# Altium PCB PCB1.PcbDoc
Units mil, origin at the board's own origin, x right, y up, seen from the top; angles counter-clockwise.
Board outline 6624.2 x 3240.03 mil, 2 copper layers (Top Layer, Bottom Layer); 35 components, 65 nets, 242 pads, 0 vias.
Unrouted connection lines stored in the file: 2.
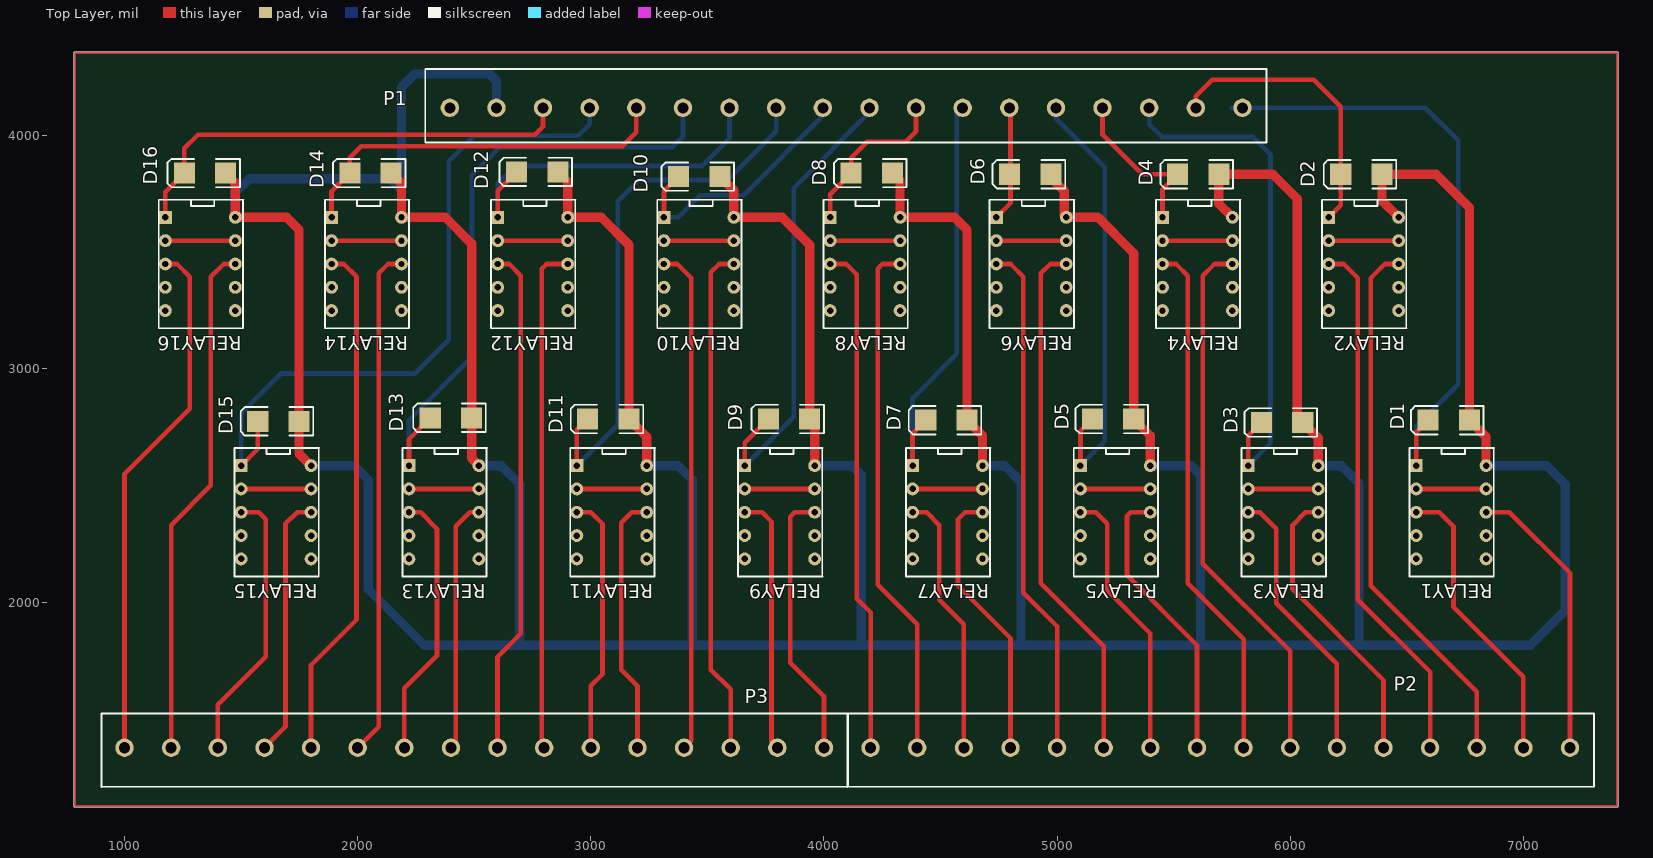
[diagram p0: Top Layer view]
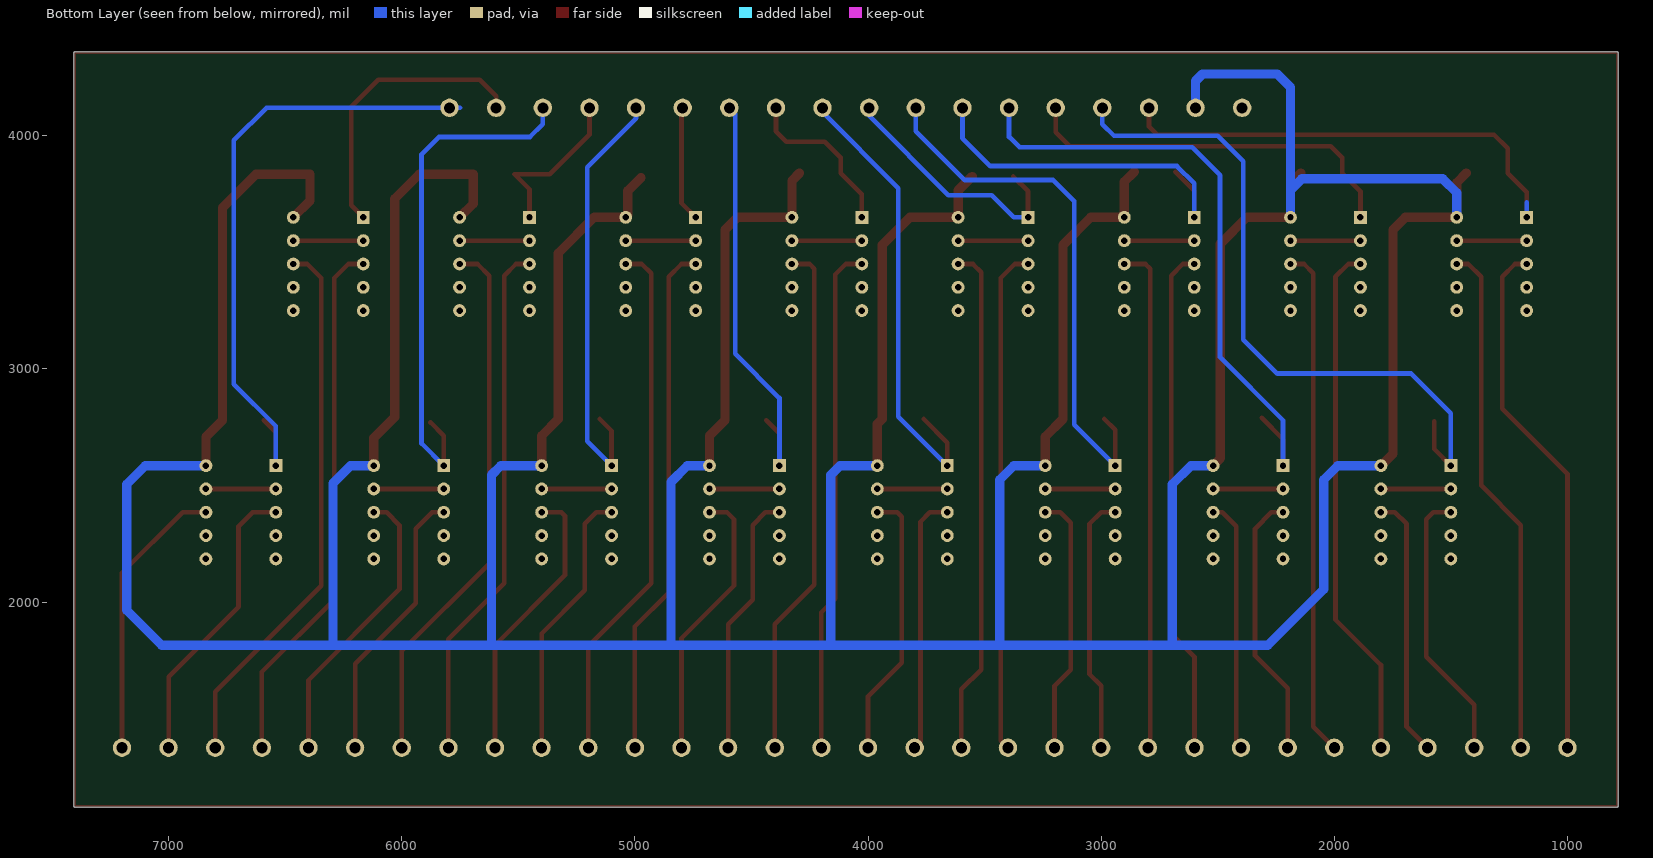
[diagram p1: Bottom Layer view, seen from below]

## Layer stack, top to bottom
Top Solder: solder mask 0.4, Solder Resist, Dk 3.5
Top Layer: signal copper 1.4
Dielectric 1: dielectric 12.6, FR-4, Dk 4.8
Bottom Layer: signal copper 1.4
Bottom Solder: solder mask 0.4, Solder Resist, Dk 3.5

## Board outline
782.39,1125 782.39,4353.35 cw(c787.4,4353.35) 782.46,4354.17 cw(c787.4,4355) 787.4,4360.02 7401.57,4360.02 cw(c7401.57,4355) 7406.59,4355 cw(c7401.57,4355) 7406.52,4354.17 cw(c7401.57,4353.35) 7406.59,4353.35 7406.59,1125 cw(c7401.57,1125) 7401.57,1119.98 787.4,1119.98 cw(c787.4,1125)

## Design rules (kind name [scope] priority, off if disabled: settings)
Clearance [All] p1: gap=20
PolygonConnect [All] p1: connectstyle=Relief reliefconductorwidth=10 reliefentries=4 polygonreliefangle="90 Angle" airgapwidth=10
RoutingVias [All] p1: holewidth=28 width=50 viastyle="Through Hole" minholewidth=28 minwidth=50 maxholewidth=28 maxwidth=50
SolderMaskExpansion [All] p1: expansion=4
Width [All] p1: maxlimit=100 minlimit=10 preferedwidth=20
30 further rules are at their usual default settings.

## Components (designator, comment, footprint, x,y, rotation, side; value= is the part's Value field where it differs from the comment)
D1 "Diode" SMB 6680,2780 r180 top
D2 "Diode" SMB 6305,3835 r180 top
D3 "Diode" SMB 5965,2770 r180 top
D4 "Diode" SMB 5605,3835 r180 top
D5 "Diode" SMB 5240,2785 r180 top
D6 "Diode" SMB 4885,3835 r180 top
D7 "Diode" SMB 4525,2780 r180 top
D8 "Diode" SMB 4205,3840 r180 top
D9 "Diode" SMB 3850,2785 r180 top
D10 "Diode" SMB 3465,3825 r180 top
D11 "Diode" SMB 3075,2785 r180 top
D12 "Diode" SMB 2770,3845 r180 top
D13 "Diode" SMB 2400,2790 r180 top
D14 "Diode" SMB 2055,3840 r180 top
D15 "Diode" SMB 1660,2775 r180 top
D16 "Diode" SMB 1345,3840 r180 top
P1 "Header 18" "CON 18" 2395,4120 r0 top
P2 "Header 16" "CON 16" 7200,1375 r180 top
P3 "Header 16" "CON 16" 4000,1375 r180 top
RELAY1 "OMRON RELAY" G6H-2 6540,2585 r270 top
RELAY2 "OMRON RELAY" G6H-2 6165,3650 r270 top
RELAY3 "OMRON RELAY" G6H-2 5820,2585 r270 top
RELAY4 "OMRON RELAY" G6H-2 5452.14,3650 r270 top
RELAY5 "OMRON RELAY" G6H-2 5100,2585 r270 top
RELAY6 "OMRON RELAY" G6H-2 4739.29,3650 r270 top
RELAY7 "OMRON RELAY" G6H-2 4380,2585 r270 top
RELAY8 "OMRON RELAY" G6H-2 4026.43,3650 r270 top
RELAY9 "OMRON RELAY" G6H-2 3660,2585 r270 top
RELAY10 "OMRON RELAY" G6H-2 3313.57,3650 r270 top
RELAY11 "OMRON RELAY" G6H-2 2940,2585 r270 top
RELAY12 "OMRON RELAY" G6H-2 2600.71,3650 r270 top
RELAY13 "OMRON RELAY" G6H-2 2220,2585 r270 top
RELAY14 "OMRON RELAY" G6H-2 1887.86,3650 r270 top
RELAY15 "OMRON RELAY" G6H-2 1500,2585 r270 top
RELAY16 "OMRON RELAY" G6H-2 1175,3650 r270 top

## Footprints (in the part's own frame and the unit in brackets; to place one, negate y for a bottom-side part, rotate by r counter-clockwise, add the part's x,y. Pads: shape width x height; smd on the part's side, far side on the other; paste and mask are expansions set on the pad)
"CON 16" [mm] "5.08mm"
  round 2 hole 1.2: 1(0,0) 2(5.08,0) 3(10.16,0) 4(15.24,0) 5(20.32,0) 6(25.4,0) 7(30.48,0) 8(35.56,0) 9(40.64,0) 10(45.72,0) 11(50.8,0) 12(55.88,0) 13(60.96,0) 14(66.04,0) 15(71.12,0) 16(76.2,0)
  silkscreen extent -2.6,-3.75 78.7,4.28
"CON 18" [mm] "5.08mm"
  round 2 hole 1.2: 1(0,0) 2(5.08,0) 3(10.16,0) 4(15.24,0) 5(20.32,0) 6(25.4,0) 7(30.48,0) 8(35.56,0) 9(40.64,0) 10(45.72,0) 11(50.8,0) 12(55.88,0) 13(60.96,0) 14(66.04,0) 15(71.12,0) 16(76.2,0) 17(81.28,0) 18(86.36,0)
  silkscreen extent -2.68,-3.77 88.98,4.23
G6H-2 [mm] "OMRON RELAY"
  rect 1.4x1.4 hole 0.7: 1(0,0)
  round 1.4 hole 0.7: 2(2.54,0) 3(5.08,0) 4(7.62,0) 5(10.16,0) 6(10.16,7.62) 7(7.62,7.62) 8(5.08,7.62) 9(2.54,7.62) 10(0,7.62)
  silkscreen extent -1.92,-0.72 12.08,8.5, body extent -1.95,-0.7 12.05,8.43, height 5.4
SMB [mm] "DO-214-AA/SMB; 2 C-Bend Leads; Body 5.3 x 3.6 mm, inc. leads (LxW)"
  rect 2.3x2.3 smd: 1(-2.25,0) 2(2.25,0)
  silkscreen extent -3.8,-1.55 4.1,1.55

## Part data
D1 D2 D3 D4 D5 D6 D7 D8 D9 D10 D11 D12 D13 D14 D15 D16: "Default Diode"
P1: "Header, 18-Pin"
P2 P3: "Header, 16-Pin"
RELAY1 RELAY2 RELAY3 RELAY4 RELAY5 RELAY6 RELAY7 RELAY8 RELAY9 RELAY10 RELAY11 RELAY12 RELAY13 RELAY14 RELAY15 RELAY16: library part "OMRON G6H-2"

## Nets (pads, with @x,y where several pads share a name; then routed paths per layer and width w, separated by ;. In a path a pad name is that pad's centre, name@x,y a point inside that pad or via, vN(x,y) a via of type N, cw(c..) or ccw(c..) an arc to the next point about the centre after c; other vN are vias at no path point)
COM1: P2.1 RELAY1.8 | length 1217.7
  Top Layer w20: RELAY1.8 6940,2385 7200,2125 P2.1
COM2: P2.3 RELAY2.8 | length 2348.3
  Top Layer w20: RELAY2.8 6405,3450 6345,3390 6345,2070 6800,1615 P2.3
COM3: P2.5 RELAY3.8 | length 1249.3
  Top Layer w20: RELAY3.8 6065,2385 6010,2330 6010,2055 6400,1665 P2.5
COM4: P2.7 RELAY4.8 | length 2328.2
  Top Layer w20: RELAY4.8 5675,3450 5625,3400 5625,2165 6000,1790 P2.7
COM5: P2.9 RELAY5.8 | length 1225.5
  Top Layer w20: RELAY5.8 5315,2385 5300,2370 5300,2115 5600,1815 P2.9
COM6: P2.11 RELAY6.8 | length 2272.7
  Top Layer w20: RELAY6.8 4970,3450 4930,3410 4930,2080 5200,1810 P2.11
COM7: P2.13 RELAY7.8 | length 1190.6
  Top Layer w20: RELAY7.8 4605,2385 4575,2355 4575,2070 4800,1845 P2.13
COM8: P2.15 RELAY8.8 | length 2230.1
  Top Layer w20: RELAY8.8 4250,3450 4230,3430 4230,2075 4400,1905 P2.15
COM9: P3.1 RELAY9.8 | length 1163.3
  Top Layer w20: RELAY9.8 3875,2385 3855,2365 3855,1740 4000,1595 P3.1
COM10: P3.3 RELAY10.8 | length 2188.3
  Top Layer w20: P3.3 3600,1625 3515,1710 3515,3415 3550,3450 RELAY10.8
COM11: P3.5 RELAY11.8 | length 1122.6
  Top Layer w20: P3.5 3200,1640 3130,1710 3130,2340 3175,2385 RELAY11.8
COM12: P3.7 RELAY12.8 | length 2178.1
  Top Layer w20: P3.7 2790,1385 2790,3430 2810,3450 RELAY12.8
COM13: P3.9 RELAY13.8 | length 1083.1
  Top Layer w20: P3.9 2420,1395 2420,2325 2480,2385 RELAY13.8
COM14: P3.11 RELAY14.8 | length 2186.7
  Top Layer w20: P3.11 2090,1465 2090,3410 2130,3450 RELAY14.8
COM15: P3.13 RELAY15.8 | length 1128
  Top Layer w20: P3.13 1690,1465 1690,2335 1740,2385 RELAY15.8
COM16: P3.15 RELAY16.8 | length 2218.2
  Top Layer w20: P3.15 1200,2330 1370,2500 1370,3395 1425,3450 RELAY16.8
DD1: D1.2 P1.18 RELAY1.1 | length 2713.8
  Top Layer w20: RELAY1.1 6540,2728.58 D1.2
  Bottom Layer w20: 5750,4120 P1.18 6580,4120 6720,3980 6720,2935 6540,2755 RELAY1.1
DD2: D2.2 P1.17 RELAY2.1 | length 1243.5
  Top Layer w20: P1.17 5595,4170 5665,4240 6100,4240 6216.42,4123.58 D2.2 6216.42,3701.42 RELAY2.1
DD3: D3.2 P1.16 RELAY3.1 | length 2226.6
  Top Layer w20: RELAY3.1 5820,2713.58 D3.2
  Bottom Layer w20: P1.16 5395,4050 5450,3995 5840,3995 5915,3920 5915,2680 RELAY3.1
DD4: D4.2 P1.15 RELAY4.1 | length 718.5
  Top Layer w20: P1.15 5195,4005 5365,3835 D4.2 5452.14,3770.73 RELAY4.1
DD5: D5.2 P1.14 RELAY5.1 | length 1886.8
  Top Layer w20: RELAY5.1 5100,2733.58 D5.2
  Bottom Layer w20: P1.14 4995,4075 5205,3865 5205,2690 RELAY5.1
DD6: D6.2 P1.13 RELAY6.1 | length 497.2
  Top Layer w20: RELAY6.1 4800,3710.71 4800,4115 P1.13
DD7: D7.2 P1.12 RELAY7.1 | length 1842.4
  Top Layer w20: RELAY7.1 4380,2723.58 D7.2
  Bottom Layer w20: RELAY7.1 4380,2875 4570,3065 4570,4095 P1.12
DD8: D8.2 P1.11 RELAY8.1 | length 719.3
  Top Layer w20: RELAY8.1 4026.43,3750.01 D8.2 4116.42,3906.42 4185,3975 4350,3975 4395,4020 P1.11
DD9: D9.2 P1.10 RELAY9.1 | length 1998.6
  Top Layer w20: RELAY9.1 3660,2683.58 D9.2
  Bottom Layer w20: RELAY9.1 3870,2795 3870,3775 4195,4100 P1.10
DD10: D10.2 P1.9 RELAY10.1 | length 1097.6
  Top Layer w20: RELAY10.1 3313.57,3762.15 D10.2
  Bottom Layer w20: RELAY10.1 3375,3650 3470,3745 3655,3745 3995,4085 P1.9
DD11: D11.2 P1.8 RELAY11.1 | length 2331
  Top Layer w20: RELAY11.1 2940,2738.58 D11.2
  Bottom Layer w20: RELAY11.1 3115,2760 3115,3720 3205,3810 3585,3810 3795,4020 P1.8
DD12: D12.2 P1.7 RELAY12.1 | length 1578.9
  Top Layer w20: RELAY12.1 2600.71,3764.3 D12.2
  Bottom Layer w20: RELAY12.1 2600.71,3795.71 2675,3870 3475,3870 3595,3990 P1.7
DD13: D13.2 P1.6 RELAY13.1 | length 2698
  Top Layer w20: RELAY13.1 2220,2698.58 D13.2
  Bottom Layer w20: RELAY13.1 2220,2780 2490,3050 2490,3830 2610,3950 3350,3950 3395,3995 P1.6
DD14: D14.2 P1.5 RELAY14.1 | length 1667.5
  Top Layer w20: RELAY14.1 1887.86,3761.44 D14.2 1966.42,3906.42 2015,3955 3135,3955 3195,4015 P1.5
DD15: D15.2 P1.4 RELAY15.1 | length 2971.3
  Top Layer w20: RELAY15.1 1571.42,2656.42 D15.2
  Bottom Layer w20: RELAY15.1 1500,2810 1670,2980 2245,2980 2390,3125 2390,3890 2500,4000 2945,4000 2995,4050 P1.4
DD16: D16.2 P1.3 RELAY16.1 | length 2052.5
  Top Layer w20: RELAY16.1 1175,3758.58 D16.2 1256.42,3946.42 1315,4005 2760,4005 2795,4040 P1.3
  Bottom Layer w20: RELAY16.1 1175,3715
GND: D1.1 D2.1 D3.1 D4.1 D5.1 D6.1 D7.1 D8.1 D9.1 D10.1 D11.1 D12.1 D13.1 D14.1 D15.1 D16.1 P1.2 RELAY1.10 RELAY2.10 RELAY3.10 RELAY4.10 RELAY5.10 RELAY6.10 RELAY7.10 RELAY8.10 RELAY9.10 RELAY10.10 RELAY11.10 RELAY12.10 RELAY13.10 RELAY14.10 RELAY15.10 RELAY16.10 | length 27146.8
  Top Layer w40: D16.1 1475,3798.58 RELAY16.10 1695,3650 1748.58,3596.42 D15.1 1748.58,2636.42 RELAY15.10 ; D14.1 2187.86,3795.73 RELAY14.10 2375,3650 2488.58,3536.42 D13.1 2488.58,2616.42 RELAY13.10 ; D12.1 2900.71,3802.87 RELAY12.10 3045,3650 3163.58,3531.42 D11.1 3240,2708.58 RELAY11.10 ; D10.1 3613.57,3765.01 RELAY10.10 3820,3650 3938.58,3531.42 D9.1 3960,2763.58 RELAY9.10 ; D8.1 4326.43,3807.15 RELAY8.10 4560,3650 4613.58,3596.42 D7.1 4680,2713.58 RELAY7.10 ; D6.1@4973.58,3820 5030,3763.58 5030,3659.29 RELAY6.10 5175,3650 5328.58,3496.42 D5.1 5400,2713.58 RELAY5.10 ; RELAY4.10 5693.58,3708.56 D4.1 5925,3835 6030,3730 6030,2793.58 D3.1 6120,2703.58 RELAY3.10 ; RELAY2.10 6393.58,3721.42 D2.1 6625,3835 6768.58,3691.42 D1.1 6840,2708.58 RELAY1.10
  Bottom Layer w40: RELAY16.10 1475,3755 1535,3815 2140,3815 2187.86,3767.14 ; RELAY15.10 1985,2585 2045,2525 2045,2055 2285,1815 2695,1815 ; RELAY14.10 2187.86,3767.14 ; RELAY13.10 2615,2585 2695,2505 2695,1815 ; P1.2 2595,4235 2565,4265 2245,4265 2187.86,4207.86 2187.86,3767.14 ; RELAY11.10 3375,2585 3435,2525 3435,1815 ; RELAY9.10 4120,2585 4160,2545 4160,1815 ; RELAY7.10 4775,2585 4845,2515 4845,1815 ; RELAY5.10 5575,2585 5615,2545 5615,1815 ; RELAY3.10 6220,2585 6295,2510 6295,1815 ; RELAY1.10 7100,2585 7180,2505 7180,1965 7030,1815 6295,1815 ; 2695,1815 3435,1815 ; 3435,1815 4160,1815 ; 4160,1815 4845,1815 ; 4845,1815 5615,1815 ; 5615,1815 6295,1815
NC1: P2.2 RELAY1.3 | length 1259.1
  Top Layer w20: RELAY1.3 6640,2385 6700,2325 6700,1980 7000,1680 P2.2
NC2: P2.4 RELAY2.3 | length 2293.3
  Top Layer w20: RELAY2.3 6230,3450 6290,3390 6290,2010 6600,1700 P2.4
NC3: P2.6 RELAY3.3 | length 1196.7
  Top Layer w20: RELAY3.3 5870,2385 5940,2315 5940,1995 6200,1735 P2.6
NC4: P2.8 RELAY4.3 | length 2253
  Top Layer w20: RELAY4.3 5510,3450 5560,3400 5560,2080 5800,1840 P2.8
NC5: P2.10 RELAY5.3 | length 1172.3
  Top Layer w20: RELAY5.3 5165,2385 5215,2335 5215,2050 5400,1865 P2.10
NC6: P2.12 RELAY6.3 | length 2218.6
  Top Layer w20: RELAY6.3 4800,3450 4855,3395 4855,2040 5000,1895 P2.12
NC7: P2.14 RELAY7.3 | length 1136.3
  Top Layer w20: RELAY7.3 4440,2385 4495,2330 4495,2010 4600,1905 P2.14
NC8: P2.16 RELAY8.3 | length 2187.1
  Top Layer w20: RELAY8.3 4095,3450 4140,3405 4140,2015 4200,1955 P2.16
NC9: P3.2 RELAY9.3 | length 1111.9
  Top Layer w20: RELAY9.3 3735,2385 3775,2345 3775,1400 P3.2
NC10: P3.4 RELAY10.3 | length 2168.7
  Top Layer w20: RELAY10.3 3370,3450 3430,3390 3430,1405 P3.4
NC11: P3.6 RELAY11.3 | length 1111.4
  Top Layer w20: RELAY11.3 3000,2385 3050,2335 3050,1690 3000,1640 P3.6
NC12: P3.8 RELAY12.3 | length 2186.4
  Top Layer w20: P3.8 2600,1765 2700,1865 2700,3400 2650,3450 RELAY12.3
NC13: P3.10 RELAY13.3 | length 1147
  Top Layer w20: P3.10 2200,1630 2340,1770 2340,2315 2270,2385 RELAY13.3
NC14: P3.12 RELAY14.3 | length 2230.7
  Top Layer w20: P3.12 1800,1730 1995,1925 1995,3395 1940,3450 RELAY14.3
NC15: P3.14 RELAY15.3 | length 1182.3
  Top Layer w20: P3.14 1400,1560 1605,1765 1605,2355 1575,2385 RELAY15.3
NC16: P3.16 RELAY16.3 | length 2263.8
  Top Layer w20: P3.16 1000,2550 1280,2830 1280,3395 1225,3450 RELAY16.3
NetRELAY1_2: RELAY1.2 RELAY1.9 | length 300
  Top Layer w20: RELAY1.2 RELAY1.9
NetRELAY2_2: RELAY2.2 RELAY2.9 | length 300
  Top Layer w20: RELAY2.2 RELAY2.9
NetRELAY3_2: RELAY3.2 RELAY3.9 | length 300
  Top Layer w20: RELAY3.2 RELAY3.9
NetRELAY4_2: RELAY4.2 RELAY4.9 | length 300
  Top Layer w20: RELAY4.2 RELAY4.9
NetRELAY5_2: RELAY5.2 RELAY5.9 | length 300
  Top Layer w20: RELAY5.2 RELAY5.9
NetRELAY6_2: RELAY6.2 RELAY6.9 | length 300
  Top Layer w20: RELAY6.2 RELAY6.9
NetRELAY7_2: RELAY7.2 RELAY7.9 | length 300
  Top Layer w20: RELAY7.2 RELAY7.9
NetRELAY8_2: RELAY8.2 RELAY8.9 | length 300
  Top Layer w20: RELAY8.2 RELAY8.9
NetRELAY9_2: RELAY9.2 RELAY9.9 | length 300
  Top Layer w20: RELAY9.2 RELAY9.9
NetRELAY10_2: RELAY10.2 RELAY10.9 | length 300
  Top Layer w20: RELAY10.2 RELAY10.9
NetRELAY11_2: RELAY11.2 RELAY11.9 | length 300
  Top Layer w20: RELAY11.2 RELAY11.9
NetRELAY12_2: RELAY12.2 RELAY12.9 | length 300
  Top Layer w20: RELAY12.2 RELAY12.9
NetRELAY13_2: RELAY13.2 RELAY13.9 | length 300
  Top Layer w20: RELAY13.2 RELAY13.9
NetRELAY14_2: RELAY14.2 RELAY14.9 | length 300
  Top Layer w20: RELAY14.2 RELAY14.9
NetRELAY15_2: RELAY15.2 RELAY15.9 | length 300
  Top Layer w20: RELAY15.2 RELAY15.9
NetRELAY16_2: RELAY16.2 RELAY16.9 | length 300
  Top Layer w20: RELAY16.2 RELAY16.9
pads on no net: P1.1 RELAY1.4 RELAY1.5 RELAY1.6 RELAY1.7 RELAY2.4 RELAY2.5 RELAY2.6 RELAY2.7 RELAY3.4 RELAY3.5 RELAY3.6 RELAY3.7 RELAY4.4 RELAY4.5 RELAY4.6 RELAY4.7 RELAY5.4 RELAY5.5 RELAY5.6 RELAY5.7 RELAY6.4 RELAY6.5 RELAY6.6 RELAY6.7 RELAY7.4 RELAY7.5 RELAY7.6 RELAY7.7 RELAY8.4 RELAY8.5 RELAY8.6 RELAY8.7 RELAY9.4 RELAY9.5 RELAY9.6 RELAY9.7 RELAY10.4 RELAY10.5 RELAY10.6 RELAY10.7 RELAY11.4 RELAY11.5 RELAY11.6 RELAY11.7 RELAY12.4 RELAY12.5 RELAY12.6 RELAY12.7 RELAY13.4 RELAY13.5 RELAY13.6 RELAY13.7 RELAY14.4 RELAY14.5 RELAY14.6 RELAY14.7 RELAY15.4 RELAY15.5 RELAY15.6 RELAY15.7 RELAY16.4 RELAY16.5 RELAY16.6 RELAY16.7
copper on no net: | length 19685
  Top Layer w10: 787.4,4353.35 787.4,1125 7401.57,1125 7401.57,4353.35 ; 787.4,4355 7401.57,4355